# Altium PCB PCB.PcbDoc
Units mm, origin at the board's own origin, x right, y up, seen from the top; angles counter-clockwise.
Board outline 79.7 x 42.8 mm, 2 copper layers (Top Layer, Bottom Layer), stack 1.571 mm thick; 109 components, 84 nets, 378 pads, 105 vias.
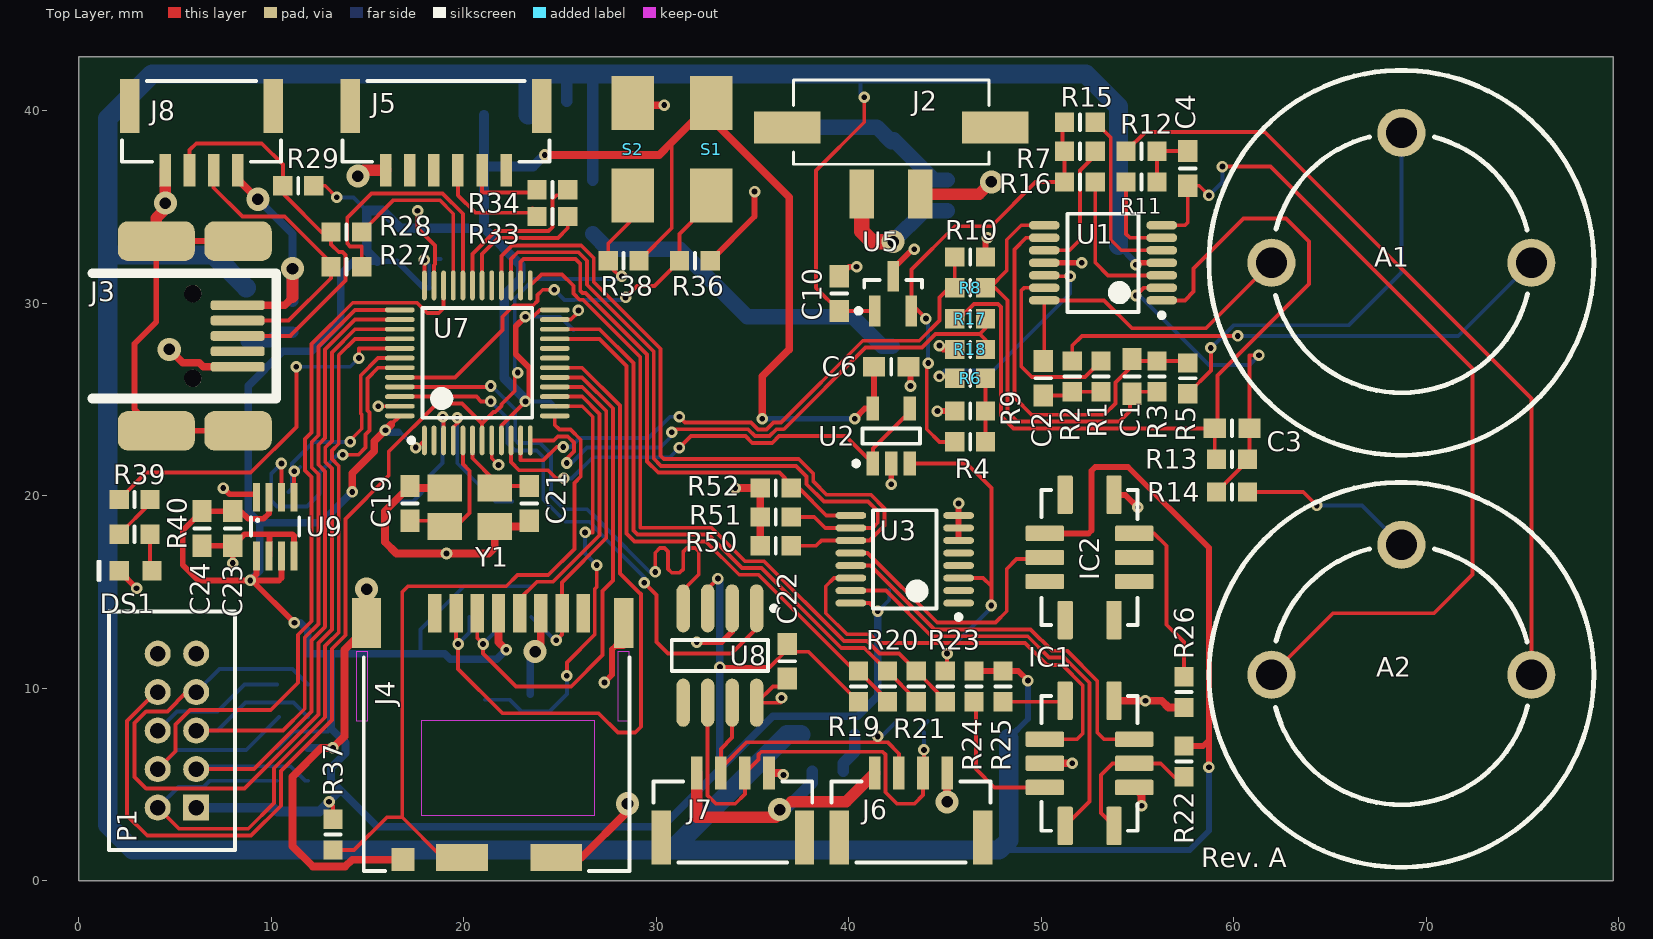
[diagram p0: Top Layer view]
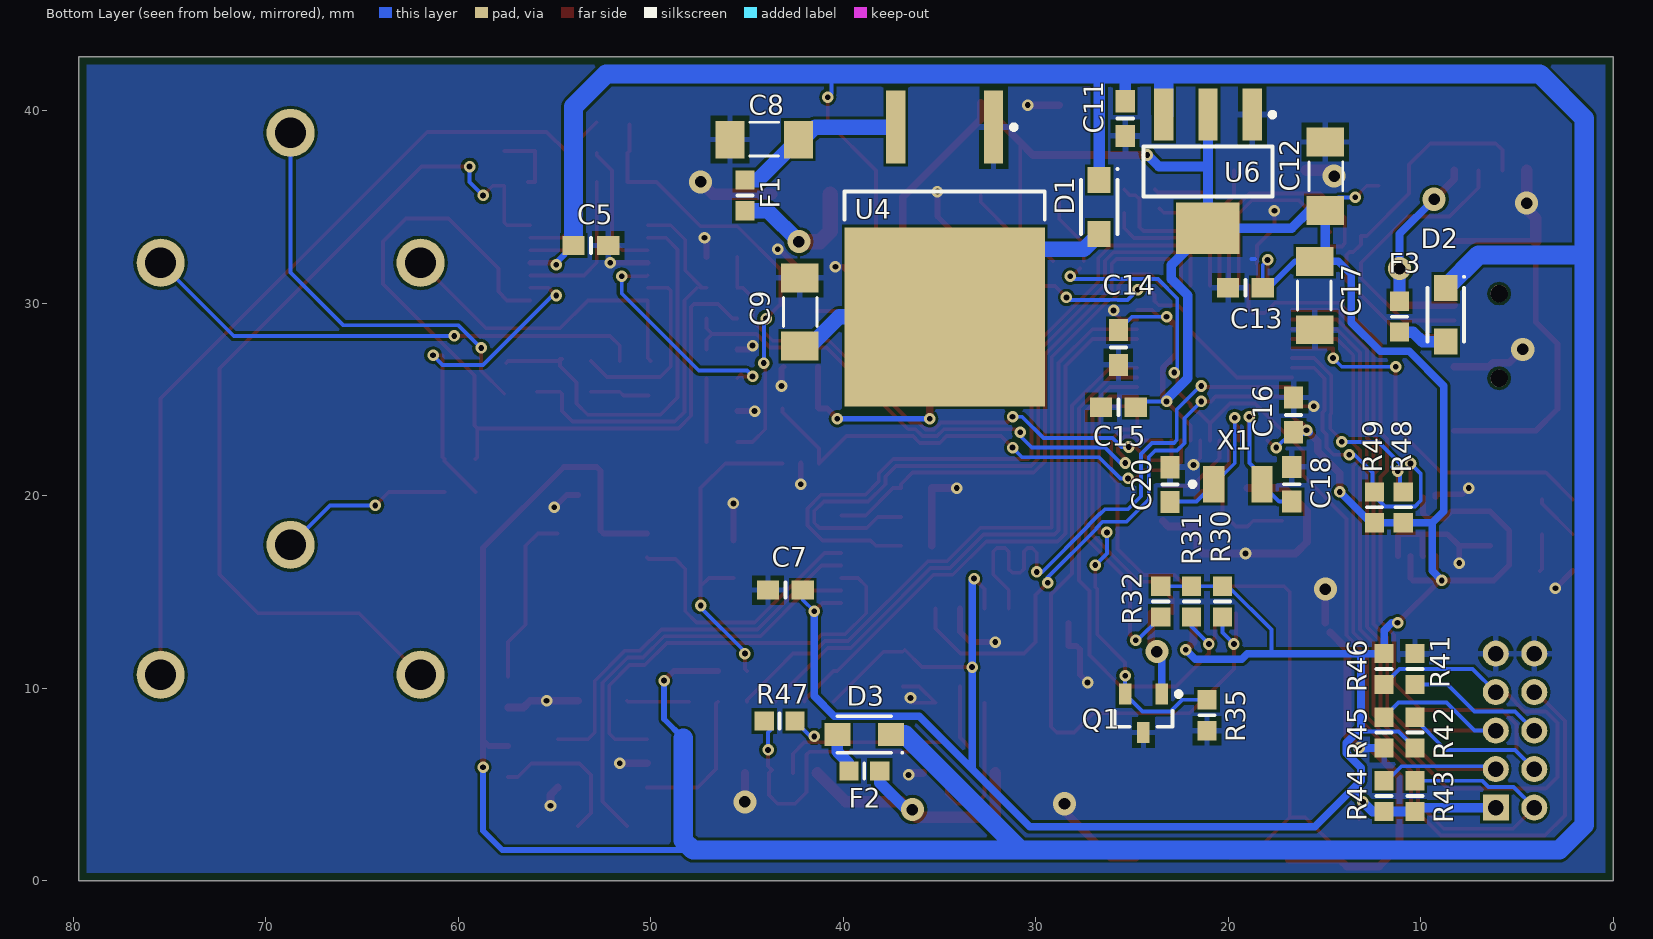
[diagram p1: Bottom Layer view, seen from below]
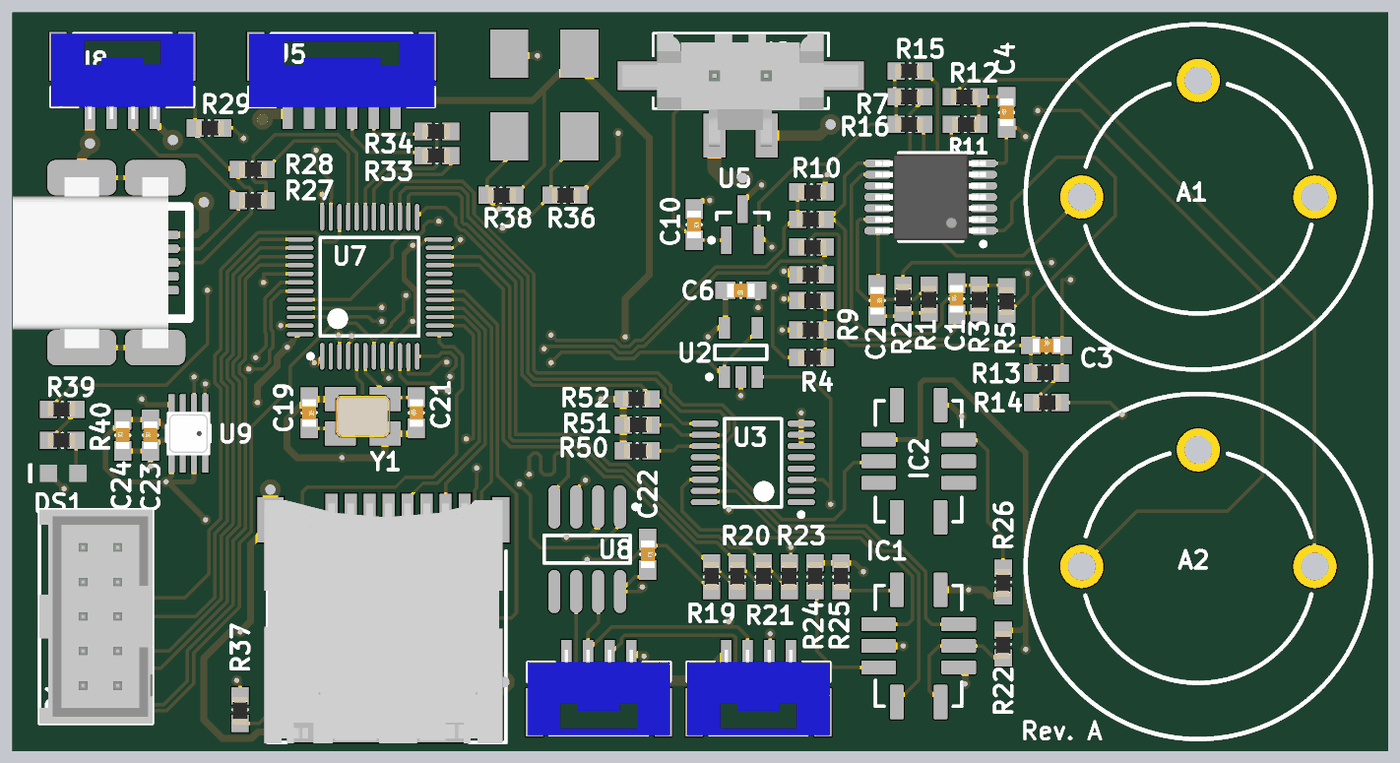
[diagram p2: 3D render of the assembled board from above, using the file's embedded part models]
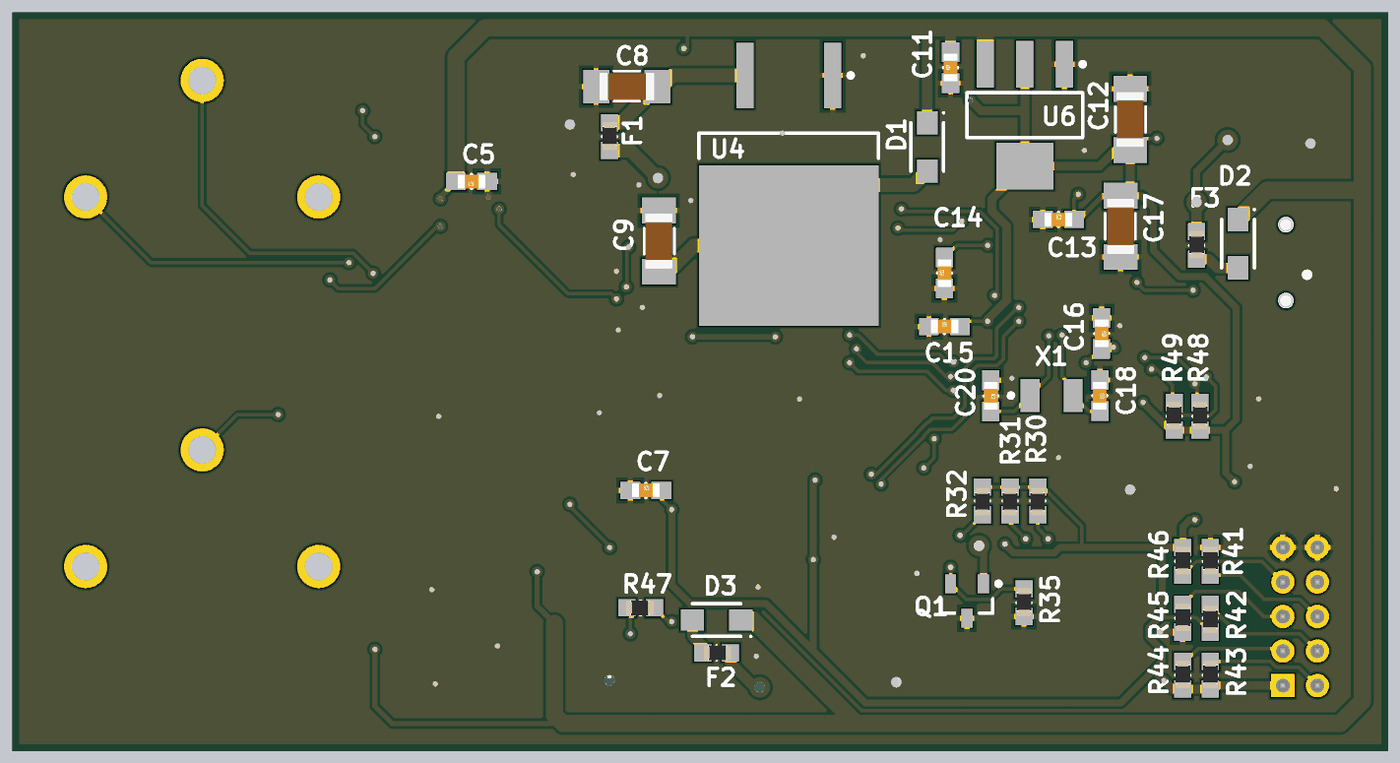
[diagram p3: 3D render of the assembled board from below, using the file's embedded part models]

## Layer stack, top to bottom
Top Solder: solder mask 0.0102, Solder Resist, Dk 3.5
Top Layer: signal copper 0.0356
Dielectric 1: dielectric 1.5, FR-4, Dk 4.8
Bottom Layer: signal copper 0.0356
Bottom Solder: solder mask 0.0102, Solder Resist, Dk 3.5

## Board outline
0,0 0,42.8 79.7,42.8 79.7,0

## Design rules (kind name [scope] priority, off if disabled: settings)
BoardOutlineClearance [All] p1: gap=0.4
Clearance [All] p1: gap=0.152
DiffPairsRouting [All] p1: maxlimit=0.254 minlimit=0.152 mostfreqgap=0.2 toplayer_minwidth=0.152 toplayer_maxwidth=0.381 toplayer_prefwidth=0.2 bottomlayer_minwidth=0.152 bottomlayer_maxwidth=0.381 bottomlayer_prefwidth=0.2 maxuncoupledlength=12.7
HoleSize [All] p1: absolutevalues=TRUE maxlimit=6.35 minlimit=0.3 maxpercent=80.000 minpercent=20.000
HoleToHoleClearance [All] p1: gap=0.2 allowstackedmicrovias=FALSE
MinimumSolderMaskSliver [All] p1: minsoldermaskwidth=0.1
PolygonConnect PolygonConnect_1 [IsVia] p1: connectstyle=Direct reliefconductorwidth=0.25 reliefentries=4 polygonreliefangle="90 Angle" airgapwidth=0.25
PolygonConnect [All] p2: connectstyle=Relief reliefconductorwidth=0.3 reliefentries=4 polygonreliefangle="90 Angle" airgapwidth=0.25
RoutingVias [All] p1: holewidth=0.3 width=0.5 viastyle="Through Hole" minholewidth=0.3 minwidth=0.5 maxholewidth=6.35 maxwidth=6 useviatemplates=TRUE viatemplateguid#1={BE180F16-D59F-4BDA-BE2E-8A3C3E13AB17} viatemplateguid#2={6D63B698-CA47-4CFF-A710-8FF1CC614475} viatemplatename#1=v60h30m0mx0 viatemplatename#2=v120h60m0mx0
SilkToSilkClearance [All] p1: silktosilkclearance=0
SilkToSolderMaskClearance [IsPad] p1: minsilkscreentomaskgap=0.178 clearancetoexposedcopper=TRUE
SolderMaskExpansion SolderMaskExpansion_1 [InComponent('U7')] p1: expansion=0.05
SolderMaskExpansion [All] p2: expansion=0.08
Width [All] p1: maxlimit=6 minlimit=0.152 preferedwidth=0.2
24 further rules are at their usual default settings.

## Classes and differential pairs
component class Processing: C13 C14 C15 C16 C17 C18 C19 C20 C21 C22 DS1 F2 F3 J3 J4 J5 J6 J7 J8 P1 Q1 R27 R28 R29 R30 R31 R32 R33 R34 R35 R36 R37 R38 R39 R40 R41 R42 R43 R44 R45 R46 R47 R48 R49 S1 S2 U7 U8 X1 Y1
component class Power: C8 C9 C10 C11 C12 D1 D2 D3 F1 J2 U4 U5 U6
component class MiCS_Sensors: C6 C7 IC1 IC2 R19 R20 R21 R22 R23 R24 R25 R26 R50 R51 R52 U2 U3
component class Electrochemical_sensors: A1 A2 C1 C2 C3 C4 C5 R1 R2 R3 R4 R5 R6 R7 R8 R9 R10 R11 R12 R13 R14 R15 R16 R17 R18 U1
component class Sensors: C23 C24 U9
net class SEN_SEL[1..3]: SEN_SEL1 SEN_SEL2 SEN_SEL3
differential pair CANBUS: +CAN_RX -CAN_TX
differential pair CAN: +CAN_P -CAN_N

## Components (designator, comment, footprint, x,y, rotation, side; value= is the part's Value field where it differs from the comment)
A1 "Electrochemical sensors" ELECTROCHEMICAL 68.7,32.1 r0 top
A2 "Electrochemical sensors" ELECTROCHEMICAL 68.7,10.7 r0 top
C1 "Capacitor" 0603_CAP 54.7,26.2 r90 top
C2 "Capacitor" 0603_CAP 50.1,26.1 r270 top
C3 "Capacitor" 0603_CAP 59.9,23.5 r0 top
C4 "Capacitor" 0603_CAP 57.6,37 r90 top
C5 "Capacitor" 0603_CAP 53.1,33 r0 bottom
C6 "Capacitor" 0603_CAP 42.2,26.7 r180 top
C7 "Capacitor" 0603_CAP 43,15.1 r180 bottom
C8 "Capacitor" 1206_CAP 44.1,38.5 r180 bottom
C9 "Capacitor" 1206_CAP 42.25,29.545 r270 bottom
C10 "Capacitor" 0603_CAP 39.5,30.5 r270 top
C11 "Capacitor" 0603_CAP 25.35,39.594 r90 bottom
C12 "Capacitor" 1206_CAP 14.95,36.594 r270 bottom
C13 "Capacitor" 0603_CAP 19.1,30.8 r180 bottom
C14 "Capacitor" 0603_CAP 25.7,27.7 r90 bottom
C15 "Capacitor" 0603_CAP 25.7,24.6 r180 bottom
C16 "Capacitor" 0603_CAP 16.6,24.2 r270 bottom
C17 "Capacitor" 1206_CAP 15.5,30.4 r90 bottom
C18 "Capacitor" 0603_CAP 16.7,20.6 r270 bottom
C19 "Capacitor" 0603_CAP 17.2,19.6 r270 top
C20 "Capacitor" 0603_CAP 23.015,20.583 r270 bottom
C21 "Capacitor" 0603_CAP 23.4,19.6 r90 top
C22 "Capacitor" 0603_CAP 36.8,11.4 r270 top
C23 "Capacitor" 0603_CAP 8,18.3 r90 top
C24 "Capacitor" 0603_CAP 6.4,18.3 r90 top
D1 "PMEG3010ER" SOD123W 26.7,35 r270 bottom
D2 "PMEG3010ER" SOD123W 8.7,29.4 r270 bottom
D3 "PMEG3010ER" SOD123W 38.9,7.6 r0 bottom
DS1 "APG1608SEKC/T" KING-LED0603-25-ORANGE_V 2.95,16.1 r0 top
F1 "2A" 0603_RES 45.1,35.6 r270 bottom
F2 "Fuse" 0603_RES 38.9,5.7 r0 bottom
F3 "Fuse" 0603_RES 11.1,29.3 r270 bottom
IC1 "MiCS-6814" MiCS 52.5,6.1 r270 top
IC2 "MiCS-2614" MiCS 52.5,16.795 r90 top
J2 "43650-0224" 43650-0224 42.2,39.124 r180 top
J3 "67503-1020" MOLX-67503-1020_V 8.25,29.9 r0 top
J4 "Mirco SD socket" HRS_DM3CS-SF 18.5,14.9 r180 top
J5 "BM06B-GHS-TBT" BM06B-GHS-TBT 22.195,36.9 r180 top
J6 "BM04B-GHS-TBT" BM04B-GHS-TBT 41.35,5.6 r0 top
J7 "BM04B-GHS-TBT" BM04B-GHS-TBT 32.1,5.6 r0 top
J8 "BM04B-GHS-TBT" BM04B-GHS-TBT 8.25,36.9 r180 top
P1 "LTMM-105-02-TX-D" SMTC-LTMM-105-02-XX-D 6.1,3.8 r90 top
Q1 "N-channel MOSFET" SOT95P230X110-3M 24.4,8.7 r270 bottom
R1 "Resitor" 0603_RES 53.1,26.2 r90 top
R2 "Resitor" 0603_RES 51.6,26.2 r270 top
R3 "Resitor" 0603_RES 56,26.2 r90 top
R4 "Resitor" 0603_RES 46.3,22.8 r180 top
R5 "Resitor" 0603_RES 57.6,26.1 r90 top
R6 "Resitor" 0603_RES 46.3,26.1 r180 top
R7 "Resitor" 0603_RES 52,37.9 r0 top
R8 "Resitor" 0603_RES 46.3,30.8 r0 top
R9 "Resitor" 0603_RES 46.3,24.4 r0 top
R10 "Resitor" 0603_RES 46.3,32.4 r180 top
R11 "Resitor" 0603_RES 55.2,36.3 r180 top
R12 "Resitor" 0603_RES 55.2,37.9 r0 top
R13 "Resitor" 0603_RES 59.9,21.9 r0 top
R14 "Resitor" 0603_RES 59.9,20.2 r180 top
R15 "Resitor" 0603_RES 52,39.4 r0 top
R16 "Resitor" 0603_RES 52,36.3 r0 top
R17 "Resitor" 0603_RES 46.3,29.2 r180 top
R18 "Resitor" 0603_RES 46.3,27.6 r0 top
R19 "Resitor" 0603_RES 40.5,10.1 r270 top
R20 "Resitor" 0603_RES 42,10.1 r270 top
R21 "Resitor" 0603_RES 43.5,10.1 r270 top
R22 "Resitor" 0603_RES 57.4,6.2 r90 top
R23 "Resitor" 0603_RES 45,10.1 r270 top
R24 "Resitor" 0603_RES 46.5,10.1 r270 top
R25 "Resitor" 0603_RES 48,10.1 r270 top
R26 "Resitor" 0603_RES 57.4,9.8 r90 top
R27 "Resitor" 0603_RES 13.9,31.9 r180 top
R28 "Resitor" 0603_RES 13.9,33.7 r180 top
R29 "Resitor" 0603_RES 11.4,36.1 r180 top
R30 "Resitor" 0603_RES 20.3,14.5 r90 bottom
R31 "Resitor" 0603_RES 21.9,14.5 r90 bottom
R32 "Resitor" 0603_RES 23.5,14.5 r90 bottom
R33 "Resitor" 0603_RES 24.6,34.5 r0 top
R34 "Resitor" 0603_RES 24.6,35.9 r0 top
R35 "Resitor" 0603_RES 21.1,8.6 r270 bottom
R36 "Resitor" 0603_RES 32,32.2 r180 top
R37 "Resitor" 0603_RES 13.2,2.4 r90 top
R38 "Resitor" 0603_RES 28.3,32.2 r180 top
R39 "Resitor" 0603_RES 2.9,19.8 r0 top
R40 "Resitor" 0603_RES 2.9,18 r0 top
R41 "Resitor" 0603_RES 10.3,11 r270 bottom
R42 "Resitor" 0603_RES 10.3,7.7 r90 bottom
R43 "Resitor" 0603_RES 10.3,4.4 r270 bottom
R44 "Resitor" 0603_RES 11.9,4.4 r270 bottom
R45 "Resitor" 0603_RES 11.9,7.7 r270 bottom
R46 "Resitor" 0603_RES 11.9,11 r270 bottom
R47 "Resitor" 0603_RES 43.3,8.3 r180 bottom
R48 "Resitor" 0603_RES 10.9,19.4 r270 bottom
R49 "Resitor" 0603_RES 12.4,19.4 r270 bottom
R50 "Resitor" 0603_RES 36.2,17.4 r180 top
R51 "Resitor" 0603_RES 36.2,18.9 r180 top
R52 "Resitor" 0603_RES 36.2,20.4 r0 top
S1 "147873-1" 147873-1 32.85,38.005 r90 top
S2 "147873-1" 147873-1 28.775,38.005 r90 top
U1 "TSZ124" TSOP65P640X120-14M 53.2,32.1 r180 top
U2 "TSZ121" SOT95P280X145-5M 42.2,23.1 r90 top
U3 "SN74LV4051A" TSOP65P640X120-16M 42.9,16.7 r180 top
U4 "LD1086D2T50TR" TO-263_N 34.725,32.845 r270 bottom
U5 "REF3025AIDBZR" TI-DBZ3_N 42.3,30.5 r90 top
U6 "LD1117AS33TR" SOT-223_M 21.05,36.844 r270 bottom
U7 "STM32F103CBT6" STM-LQFP48_L 20.7,26.9 r90 top
U8 "MAX3051" SOIC127P600X175-8M 33.3,11.7 r270 top
U9 "BME280" BME280 10.2,18.4 r90 top
X1 "ABS07-32.768KHz-T" ABRA-ABS07-2_V 19.5,20.6 r180 bottom
Y1 "TSX-3225 16.0000MF09Z-AC3" TSX-3225 20.3,19.4 r0 top

## Footprints (in the part's own frame and the unit in brackets; to place one, negate y for a bottom-side part, rotate by r counter-clockwise, add the part's x,y. Pads: shape width x height; smd on the part's side, far side on the other; paste and mask are expansions set on the pad)
0603_CAP [mm] "Chip Capacitor, 2-Leads, Body 1,60x0,80mm, IPC Low Density"
  rect 1.15x1 smd: 1(-0.9,0) 2(0.9,0)
  silkscreen extent 0,-0.4 0,0.4, body extent -0.8,-0.4 0.8,0.4, height 0.3
0603_RES [mm] "Chip Resistor, 2-Leads, Body 1,57x0,85mm, IPC Medium Density"
  rect 1x1 smd: 1(-0.8,0) 2(0.8,0)
  silkscreen extent 0,-0.4 0,0.4, body extent -0.85,-0.42 0.75,0.43, height 0.45
1206_CAP [mm] "Chip Capacitor, 2-Leads, Body 3,20x1,60mm, IPC Low Density"
  rect 1.5x1.95 smd: 1(-1.775,0) 2(1.775,0)
  silkscreen extent -0.75,-0.85 0.75,0.9, body extent -1.6,-0.8 1.6,0.8, height 1.6
43650-0224 [mil]
  rect 50x100 smd: 1(60,136) 2(-59.06,136)
  rect 136x65 smd: TAB1(213,0) TAB2(-212.2,0)
  silkscreen extent -200,-97 200,75, body extent -268,-97 270,161, height 392
147873-1 [mm] "SPST TE Conectivity push button"
  rect 2.8x2.2 smd: 1(-2.4,0) 2(2.4,0)
  body extent -3,-1.75 3,1.75, height 5
ABRA-ABS07-2_V [mm] "Hand Drawn, 2-Leads, Body 3.2x1.5mm, Pitch 2.5mm"
  rect 1.1x1.9 smd: 1(-1.25,0) 2(1.25,0)
  silkscreen extent -2.48,-0.12 -2.23,0.12, body extent -1.6,-0.75 1.6,0.75, height 0.9
BM04B-GHS-TBT [mm] "Vertical"
  rect 1x2.8 smd: 0(-1.85,-3.35) 0(5.6,-3.35)
  rect 0.6x1.7 smd: 1(0,0) 2(1.25,0) 3(2.5,0) 4(3.75,0)
  silkscreen extent -2.25,-4.65 6,-0.45, body extent -2.25,-4.68 6,0.27, height 4.18
BM06B-GHS-TBT [mm] "Vertical"
  rect 1x2.8 smd: 0(-1.85,-3.35) 0(8.1,-3.35)
  rect 0.6x1.7 smd: 1(0,0) 2(1.25,0) 3(2.5,0) 4(3.75,0) 5(5,0) 6(6.25,0)
  silkscreen extent -2.25,-4.65 8.5,-0.45, body extent -2.28,-4.65 8.48,0.3, height 3.88
BME280 [mm]
  rect 1.5x0.35 smd mask+0.08: 1(1.525,0.975) 2(1.525,0.325) 3(1.525,-0.325) 4(1.525,-0.975) 5(-1.525,-0.975) 6(-1.525,-0.325) 7(-1.525,0.325) 8(-1.525,0.975)
  silkscreen extent -0.48,-1.25 0.48,1.25, body extent -1.25,-1.25 1.25,1.25, height 0.95
ELECTROCHEMICAL [mm]
  round 2.5 hole 1.6: C(-6.75,0) R(6.75,0) S(0,6.75)
  silkscreen extent -10,-10 10,10, body extent -10,-10 10,10, height 16.6
HRS_DM3CS-SF [mm]
  rect 1x2.6 smd: 0(-9.8,1.5)
  rect 2.7x1.4 smd: 0(-6.3,13.7) A(-1.4,13.7)
  rect 1.2x1.2 smd: 0(1.65,13.8)
  rect 1.5x2.6 smd paste-25.4 mask-25.4: 0(3.55,1.5)
  rect 0.7x2 smd paste-25.4 mask-25.4: 1(0,1) 2(-1.1,1) 3(-2.2,1) 4(-3.3,1) 5(-4.4,1) 6(-5.5,1) 7(-6.6,1) 8(-7.7,1)
  Top Layer keep-out region: -8.3,6.6 0.7,6.6 0.7,11.5 -8.3,11.5
  Top Layer keep-out region: -10.1,3 -9.5,3 -9.5,6.6 -10.1,6.6
  Top Layer keep-out region: 3.5,3 4.1,3 4.1,6.6 3.5,6.6
  silkscreen extent -10.1,3.3 3.7,14.4, body extent -9.9,0.35 3.9,14.45, height 1.98
KING-LED0603-25-ORANGE_V [mm] "LED, SMT, Body 1.6 x 0.8 mm, 0.25mm Thickness"
  rect 1x1 smd paste+0 mask+0: 1(0.85,0) 2(-0.85,0)
  body extent -0.8,-0.4 0.8,0.4, height 0.25
MiCS [mm]
  rrect20% 0.8x2 smd: A(-1.25,-2.32) B(0,-2.32) C(1.25,-2.32) F(1.25,2.32) G(0,2.32) H(-1.25,2.32)
  rrect20% 2x0.8 smd: D(3.25,-1.27) E(3.25,1.27) J(-3.25,1.27) K(-3.25,-1.27)
  silkscreen extent -3.5,-2.5 3.5,2.5
MOLX-67503-1020_V [mm] "Mini USB Connector, SMT, Righer Angle"
  rrect50% 2.8x0.5 smd: 1(0,0) 2(0,-0.8) 3(0,-1.6) 4(0,-2.4) 5(0,-3.2)
  rrect50% 3.5x2.05 smd: 6(0.025,3.325) 8(0.025,-6.525)
  rrect50% 4x2.05 smd: 7(-4.225,3.325) 9(-4.225,-6.525)
  round 0.9 hole 0.9 unplated: X(-2.325,-3.8) Y(-2.325,0.6)
  silkscreen extent -7.55,-4.85 2,1.65, body extent -8.22,-6.56 0.78,3.34, height 3.95
SMTC-LTMM-105-02-XX-D [mm] "Shrouded Header & Stacker, 2x5 Pins, Vertical, 2mm Pitch, Male"
  rect 1.35x1.35 hole 0.81: 1(0,0)
  round 1.35 hole 0.81: 2(0,2) 3(2,0) 4(2,2) 5(4,0) 6(4,2) 7(6,0) 8(6,2) 9(8,0) 10(8,2)
  silkscreen extent -2.19,-2.01 10.19,4.53, body extent -2.19,-2.01 10.19,4.52, height 4.83
SOD123W [mm] "Molded Diode, 2-Leads, Body 2,60x1,70mm, IPC Low Density"
  rect 1.35x1.2 smd: 1(-1.4,0) 2(1.4,0)
  silkscreen extent -2.02,-0.95 1.4,1, body extent -1.4,-0.95 1.4,0.95, height 1.1
SOIC127P600X175-8M [mm] "SOIC, 8-Leads, Body 4,90x3,90mm, Pitch 1,27mm, IPC Low Density"
  oval 2.5x0.7 smd: 1(-2.45,1.905) 2(-2.45,0.635) 3(-2.45,-0.635) 4(-2.45,-1.905) 5(2.45,-1.905) 6(2.45,-0.635) 7(2.45,0.635) 8(2.45,1.905)
  silkscreen extent -2.57,-2.5 0.8,2.93, body extent -2,-2.5 2,2.5, height 1.75
SOT95P230X110-3M [mm] "SOT23, 3-Leads, Body 2,90x2,30mm, Pitch 0,95mm, IPC Low Density"
  rect 1.1x0.65 smd: 1(-1,0.95) 2(-1,-0.95) 3(1,0)
  silkscreen extent -1.12,-1.5 0.7,1.95, body extent -0.7,-1.5 0.7,1.5, height 1.1
SOT95P280X145-5M [mm] "SOT23, 5-Leads, Body 2,90x2,80mm, Pitch 0,95mm, IPC Low Density"
  rect 1.25x0.65 smd: 1(-1.425,0.95) 2(-1.425,0) 3(-1.425,-0.95) 4(1.425,-0.95) 5(1.425,0.95)
  silkscreen extent -1.55,-1.5 0.4,1.95, body extent -0.8,-1.5 0.8,1.5, height 1.45
SOT-223_M [mm] "SOT223, 4-Leads, Body 6.5x3.5mm, Pitch 2.3mm, Lead Span 7mm, IPC Low Density"
  rect 2.7x1 smd: 1(-2.95,2.3) 2(-2.95,0) 3(-2.95,-2.3)
  rect 2.7x3.3 smd: 4(2.95,0)
  silkscreen extent -3.07,-3.35 1.3,3.47, body extent -1.85,-3.35 1.85,3.35, height 1.8
STM-LQFP48_L [mm] "QFP, 48-Leads, Body 7x7mm, Pitch 0.5mm, IPC High Density"
  oval 1.55x0.25 smd: 1(-4.025,2.75) 2(-4.025,2.25) 3(-4.025,1.75) 4(-4.025,1.25) 5(-4.025,0.75) 6(-4.025,0.25) 7(-4.025,-0.25) 8(-4.025,-0.75) 9(-4.025,-1.25) 10(-4.025,-1.75) 11(-4.025,-2.25) 12(-4.025,-2.75) 25(4.025,-2.75) 26(4.025,-2.25) 27(4.025,-1.75) 28(4.025,-1.25) 29(4.025,-0.75) 30(4.025,-0.25) 31(4.025,0.25) 32(4.025,0.75) 33(4.025,1.25) 34(4.025,1.75) 35(4.025,2.25) 36(4.025,2.75)
  oval 0.25x1.55 smd: 13(-2.75,-4.025) 14(-2.25,-4.025) 15(-1.75,-4.025) 16(-1.25,-4.025) 17(-0.75,-4.025) 18(-0.25,-4.025) 19(0.25,-4.025) 20(0.75,-4.025) 21(1.25,-4.025) 22(1.75,-4.025) 23(2.25,-4.025) 24(2.75,-4.025) 37(2.75,4.025) 38(2.25,4.025) 39(1.75,4.025) 40(1.25,4.025) 41(0.75,4.025) 42(0.25,4.025) 43(-0.25,4.025) 44(-0.75,4.025) 45(-1.25,4.025) 46(-1.75,4.025) 47(-2.25,4.025) 48(-2.75,4.025)
  silkscreen extent -4.15,-2.85 2.85,3.55, body extent -3.5,-3.5 3.5,3.5, height 1.6
TI-DBZ3_N [mm] "SOT23, 3-Leads, Body 2.92x1.3 mm, Pitch 0.95 mm, IPC Medium Density"
  rect 1.6x0.6 smd: 1(-0.9,0.95) 2(-0.9,-0.95) 3(0.9,0)
  silkscreen extent -1.02,-1.5 0.7,1.92, body extent -0.7,-1.52 0.7,1.52, height 1.12
TO-263_N [mm] "D2-PAK, 4-Leads, Body 9.2x10.2mm, Pitch 2.54mm, Lead Span 15.4mm, IPC Medium Density"
  rect 3.8x1 smd: 1(-6.3,2.54) 3(-6.3,-2.54)
  rect 9.3x10.4 smd: 4(3.55,0)
  silkscreen extent -6.42,-5.2 -1.5,5.2, body extent -2.95,-5.2 6.4,5.2, height 4.6
TSOP65P640X120-14M [mm] "TSOP, 14-Leads, Body 5,00x4,40mm, Pitch 0,65mm, IPC Low Density"
  oval 1.6x0.45 smd mask+0.05: 1(-3.05,1.95) 2(-3.05,1.3) 3(-3.05,0.65) 4(-3.05,0) 5(-3.05,-0.65) 6(-3.05,-1.3) 7(-3.05,-1.95) 8(3.05,-1.95) 9(3.05,-1.3) 10(3.05,-0.65) 11(3.05,0) 12(3.05,0.65) 13(3.05,1.3) 14(3.05,1.95)
  silkscreen extent -3.18,-2.55 1.85,2.85, body extent -3.2,-2.5 3.2,2.5, height 1.1
TSOP65P640X120-16M [mm] "TSOP, 16-Leads, Body 5,00x4,40mm, Pitch 0,65mm, IPC Low Density"
  oval 1.6x0.35 smd: 1(-2.8,2.275) 2(-2.8,1.625) 3(-2.8,0.975) 4(-2.8,0.325) 5(-2.8,-0.325) 6(-2.8,-0.975) 7(-2.8,-1.625) 8(-2.8,-2.275) 9(2.8,-2.275) 10(2.8,-1.625) 11(2.8,-0.975) 12(2.8,-0.325) 13(2.8,0.325) 14(2.8,0.975) 15(2.8,1.625) 16(2.8,2.275)
  silkscreen extent -2.93,-2.55 1.65,3.12, body extent -2.25,-2.55 2.25,2.55, height 1.2
TSX-3225 [mm]
  rect 1.8x1.4 smd: 1(-1.3,-1) 2(1.3,-1) 3(1.3,1) 4(-1.3,1)
  body extent -1.6,-1.25 1.6,1.25, height 0.6

## Part data
A1 A2: library part Electrochemical_sensor
D1 D2 D3: library part "D Schottky", "Schottky Diode"
DS1: library part CMP-0239-00002-1, "LED, SMT, 0603(1608), 0.25mm Tthickness, Super Bright Orange"
F1: library part Fuse
IC2: library part MiCS-5524
J2: library part HEADER_POS2_?43650-0224, "Molex - Micro-Fit 3.0 Series connector,  3.00mm (0.118\") pitch header, 2 positions."
J3: library part CMP-0411-00002-1, "USB, MINI, SMD, RA KME04-USBMU03A01"
J4: library part Micro_SD
J5 J6 J7 J8: "JST GH top entry SMD connector"
P1: library part CMP-1028-00010-1, "Shrouded Header & Stacker, Through-Hole, Vertical, -55 to 105 degC, 2 mm Pitch, 10-Pin, Male, RoHS"
Q1: library part MOSFET-N
S1 S2: library part SW-SPST, "Single-Pole, Single-Throw Switch"
U3: "Analog Multiplexer/Demultiplexer"
U4: library part CMP-0244-00124-1, "1.5A, Low Drop Positive Voltage Regulator, 5.0V, 3-Pin D2PAK, Tape and Reel"
U5: library part CMP-0367-00155-1, "2.5 V, 50 ppm / degC, 50 uA Series (Bandgap) Voltage Reference, -40 to 125 degC, 3-pin SOT-23 (DBZ), Green (RoHS & no Sb/Br)"
U6: library part CMP-0244-00316-1, "1A, Low Drop Positive Voltage Regulator, 3.3V, 4-Pin SOT-223, Tape and Reel"
U7: library part CMP-0237-00250-3, "ARM Cortex-M3 32-bit MCU, 128 KB Flash, 20 KB Internal RAM, 37 I/Os, 48-pin LQFP, -40 to 85 degC, Tray"
U9: "Combined humidity and pressure sensor"
X1: library part CMP-0447-00001-2, "Crystal, 32.768 kHz, 12.5 pF, -40 to 85 degC, SMD Low Profile 3.2 x 1.5 x 0.9 mm, Tape and Reel"

## Via types
v1: diameter 0.6, hole 0.3, Top Layer to Bottom Layer, tented both sides, 93 vias
v2: diameter 1.2, hole 0.6, Top Layer to Bottom Layer, tented both sides, 12 vias

## Nets (pads, with @x,y where several pads share a name; then routed paths per layer and width w, separated by ;. In a path a pad name is that pad's centre, name@x,y a point inside that pad or via, vN(x,y) a via of type N, cw(c..) or ccw(c..) an arc to the next point about the centre after c; other vN are vias at no path point)
2.5V: R4.2 R7.1 R15.1 R16.1 U5.2 | length 23.3
  Top Layer w0.2: v1(44,29.2) 43.3,29.9 43.25,29.9 43.25,31.75 45.5,34 47.4,34 49.7,36.3 R16.1 51.2,37.8 51.1,37.9 R15.1@51.1,39.3 ; v1(44.127,26.891) 44.048,26.812 44.048,23.452 44.7,22.8 R4.2
  Bottom Layer w0.2: v1(44,29.2) 44.109,29.091 44.109,26.891 v1(44.127,26.891)
3.3V: C6.2 C7.2 C12.2 C13.2 C14.2 C15.2 C16.2 C17.2 C22.1 C23.2 C24.2 J4.4 P1.1 R19.2 R29.1 R30.2 R31.2 R32.2 R37.2 R38.1 R42.1 R43.2 R44.2 R46.1 R48.2 R49.2 S1.2 U2.5 U3.16 U6.2 U6.4 U7.1 U7.9 U7.24 U7.36 U7.48 U8.3 U9.2 U9.6 U9.8 | length 251.5
  Top Layer w0.2: R29.1 12.8,36.1 v1(13.4,35.5) ; v1(13,4.1) 13.2,3.9 R37.2 ; 16.225,23.7 U7.48 ; v1(17.5,22.5) 17.575,22.5 U7.1 ; U7.36 v1(17.95,32.25) ; U7.9 21.95,23.65 v1(23.2,24.9) ; v1(23.2,29.3) 23.6,29.3 23.95,29.65 U7.24 ; R38.1 30.8,33.9 30.8,38.355 ; U8.3 32.665,15.165 v1(33.2,15.7) ; v1(33.3,11.1) 35.9,11.1 36.8,12 36.9,11.9 37.9,11.9 R19.2 ; U3.16 41.075,14.425 v1(41.5,14)
  Top Layer w0.3: U9.8 9.225,15.925 v1(8.9,15.6) ; U9.2 9.875,19.075 9.6,18.8 8.8,18.8 8.4,19.2 C23.2 C24.2 5.4,18.2 5.4,16.4 6.2,15.6 v1(8.9,15.6) ; U9.6 10.525,15.725 10.4,15.6 v1@9,15.6 ; v1(11.2,13.4) v1@9,15.6 ; v1(23.2,24.9) 23.4,25.1 23.4,26.148 23.402,26.15 23.402,26.65 22.7,27.352 22.7,28.8 v1(23.2,29.3) ; v1(40.3,24) 40.825,24.525 U2.5 41.3,24.575 C6.2 ; v1(8.9,15.6) v1@9,15.6
  Top Layer w0.4: v1(14.2,20.2) 14.2,21.16 15.35,22.31 15.35,22.825 v1(15.925,23.4) 16.225,23.7 ; J4.4 21.8,12.4 v1(22.2,12) ; v1(24.2,37.7) 30.145,37.7 30.8,38.355 S1.2 32.85,39.55 36.9,35.5 36.9,27.6 35.5,26.2 v1(35.5,24)
  Bottom Layer w0.2: R42.1 11.148,7.748 12.948,7.748 13.1,7.9 ; v1(13.4,35.5) 14.269,35.5 C12.2 ; C16.2 16.7,23.3 v1(17.5,22.5) ; 17.7,11.8 17.75,11.85 17.75,13.05 20,15.3 R30.2 R31.2 R32.2 ; v1(17.95,32.25) 18.2,32 C13.2 ; v1(23.2,24.9) 24.5,24.9 C15.2 ; v1(23.2,29.3) 25,29.3 C14.2 ; v1(41.5,14) 42.1,14.6 C7.2
  Bottom Layer w0.3: v1(11.2,13.4) v1@11.5,13.4 ; C17.2 16.525,32.175 17.9,30.8 C13.2 ; v1(35.5,24) v1(40.3,24)
  Bottom Layer w0.4: v1(8.9,15.6) 9.4,16.1 9.4,18.6 ; v1@11.5,13.4 11.9,13 R46.1 13.2,11.8 ; v1(13,4.1) 13.5,4.6 13.7,4.6 ; v1(14.2,20.2) 12.6,18.6 R49.2 R48.2 9.4,18.6 ; C17.2 14.275,32.175 13.6,31.5 13.6,29 12.1,27.5 10.6,27.5 8.8,25.7 8.8,19.2 9.4,18.6 ; v1@15.8,23.3 C16.2 ; v1(22.2,12) 21.7,11.5 19.3,11.5 19,11.8 17.7,11.8 13.2,11.8 ; v1(33.2,15.7) 33.3,15.6 v1(33.3,11.1) 33.3,5.8 ; v1(41.5,14) 41.5,9.6 40.452,8.552 36.052,8.552 33.3,5.8 ; 13.2,11.8 13.1,11.7 13.1,7.9 13.123,7.9 13.852,7.17 13.852,6.63 13.1,5.877 13.1,5.2 13.7,4.6 ; 13.7,4.6 15.5,2.8 30.3,2.8 33.3,5.8
  Bottom Layer w0.5: P1.1 10.1,3.8 R43.2 R44.2 12.5,3.6 v1(13,4.1) ; C17.2 14.95,32.725 C12.2 15.781,34.819 16.706,33.894 U6.4 ; U6.2 21.05,37.1 ; v1(23.2,24.9) 23.2,25.007 22.098,26.109 22.098,30.408 22.95,31.26 22.95,31.994 U6.4 ; v1(24.2,37.7) 23.6,37.1 21.05,37.1 ; U6.4 21.05,37.1
5V: C5.2 C10.2 C11.2 D1.1 D2.1 D3.1 IC2.F R22.2 R24.1 R25.1 U1.4 U5.1 U6.3 | length 243.1
  Top Layer w0.2: v1(40.8,40.7) 40.8,39.4 38.3,36.9 38.3,30.8 C10.2 U5.1
  Top Layer w0.3: R24.1 R25.1 48.8,10.9 v1(49.3,10.4) ; IC2.F 52.445,18.045 52.6,18.2 52.6,21.3 52.8,21.5 54.5,21.5 58.7,17.3 58.7,7.3 ; v1(54.9,32) 55,32.1 U1.4 ; R22.2 58.4,7 58.7,7.3 ; v1(58.7,5.9) 58.7,7.3
  Bottom Layer w0.2: 40.6,41.9 40.6,40.9 v1(40.8,40.7)
  Bottom Layer w0.3: 47.8,1.6 57.7,1.6 58.7,2.6 v1(58.7,5.9) ; 48.3,7.4 49.3,8.4 v1(49.3,10.4) ; C5.2 54.9,32.1 v1(54.9,32)
  Bottom Layer w0.6: 25.3,41.9 25.35,41.85 C11.2 ; 26.5,41.9 26.7,41.7 D1.1
  Bottom Layer w1: D2.1 7,32.5 1.5,32.5 ; U6.3 23.35,41.65 23.1,41.9 ; D3.1 36.8,7.6 30.8,1.6 ; 48.3,7.4 48.3,2.1 47.8,1.6 30.8,1.6 ; C5.2 54,40.2 52.3,41.9 40.6,41.9 26.5,41.9 25.3,41.9 23.1,41.9 ; 1.5,32.5 1.5,39.6 3.8,41.9 23.1,41.9 ; 1.5,32.5 1.5,2.9 2.8,1.6 30.8,1.6
5V_CAN: D3.2 F2.2 | length 2.1
  Bottom Layer w0.6: F2.2 39.7,6.1 40.3,6.7 D3.2
5V_D: C9.2 D1.2 U4.4 | length 18
  Bottom Layer w0.8: D1.2 27.5,32.8 31.22,32.8 U4.4 40.205,29.295 41.73,27.77 C9.2
BOOT0: R36.2 S1.1 U7.44 | length 22.2
  Top Layer w0.2: U7.44 19.55,26.15 22,28.6 22,29.3 22.598,29.898 23.606,29.898 23.827,30.119 23.827,30.427 24.1,30.7 v1(24.7,30.7) ; v1(28.4,30.3) 29,30.9 29.9,30.9 R36.2 31.2,33.6 32.85,35.25 S1.1
  Bottom Layer w0.2: v1(24.7,30.7) 25.227,30.173 25.716,30.173 25.724,30.18 26.181,30.18 26.188,30.173 28.273,30.173 v1(28.4,30.3)
CAN_N: J6.3 J7.3 R47.1 U8.6 | length 24.8
  Top Layer w0.2: U8.6 32.665,4.435 33.1,4 34.1,4 34.6,4.5 J7.3 35.298,6.298 35.298,6.555 35.445,6.702 41.755,6.702 41.902,6.555 41.902,4.598 42.5,4 43.4,4 43.85,4.45 J6.3 43.7,5.75 43.9,5.95 v1(43.9,6.8)
  Bottom Layer w0.2: v1(43.9,6.8) 43.9,7.7 43.7,7.9 R47.1
CAN_P: J6.2 J7.2 R47.2 U8.7 | length 17.2
  Top Layer w0.2: U8.7@33.935,10.087 U8.7 33.935,7.435 33.35,6.85 33.35,5.857 34.693,7.2 41.5,7.2 ; v1(41.5,7.5) 41.5,7.2 ; J6.2 42.6,6.6 42,7.2 41.5,7.2
  Bottom Layer w0.2: v1(41.5,7.5) 41.7,7.5 R47.2
CAN_RX: U7.45 U8.4 | length 28.4
  Top Layer w0.2: U7.45 21.35,25.65 v1(21.4,25.7) ; v1(29.941,16.041) 29.941,17.041 30.179,17.279 30.421,17.279 30.6,17.1 30.6,16.2 30.8,16 31.2,16 31.4,16.2 31.4,17.1 31.579,17.279 32.021,17.279 32.2,17.1 32.2,15.9 31.395,15.095 U8.4 U8.4@31.4,14.155
  Bottom Layer w0.2: v1(21.4,25.7) 21.449,25.7 22.673,24.476 22.673,22.895 22.82,22.748 23.952,22.748 24.523,22.177 24.523,19.977 25.2,19.3 26.4,19.3 26.652,19.048 26.69,19.048 27.248,18.49 27.248,18.452 29.659,16.041 v1(29.941,16.041)
CAN_TX: U7.46 U8.1 | length 29.3
  Top Layer w0.2: U7.46 20.65,25.15 20.9,24.9 v1(21.4,24.9) ; v1(29.376,15.476) 30,14.851 30,12.4 30.6,11.8 33.905,11.8 35.205,13.1 U8.1
  Bottom Layer w0.2: v1(21.4,24.9) 22.273,24.027 22.273,22.73 22.655,22.348 23.787,22.348 24.123,22.011 24.123,19.811 25.287,18.648 26.524,18.648 26.848,18.324 26.848,18.287 29.376,15.759 v1(29.376,15.476)
CARD_DETECT: J4.A R37.1 U7.13 | length 37.8
  Top Layer w0.2: R37.1 14.3,1.6 16,3.3 16.8,3.3 ; J4.A 18.9,1.2 16.8,3.3 ; U7.13 24.725,23.675 24.964,23.436 25.542,23.436 26.072,22.906 26.072,20.991 25.743,20.662 25.743,17.243 24.382,15.882 22.784,15.882 22.202,15.3 17.1,15.3 16.8,15 16.8,3.3
CARD_PWR: Q1.2 R35.1 U7.14 | length 22.8
  Top Layer w0.2: U7.14 26.15,24.65 26.695,24.105 26.695,18.095 v1(26.295,18.095) ; v1(25.35,10.65) 25.35,11.343 26.802,12.795 26.802,15.152 26.9,15.25 v1(26.9,16.4)
  Bottom Layer w0.2: R35.1 22.4,9.4 23,8.8 24.45,8.8 Q1.2 v1(25.35,10.65) ; v1(26.295,18.095) 26.295,17.005 v1(26.9,16.4)
CO_RES: IC1.H U3.13 | length 20
  Top Layer w0.2: U3.13 40.103,16.372 41.122,16.372 41.125,16.375 44.443,13.057 49.44,13.057 50.544,11.952 51.334,11.952 52.9,10.387 52.9,7.7 53.25,7.35 IC1.H
DEBUG_JTCK: P1.5 R45.1 U7.37 | length 37.2
  Top Layer w0.2: P1.5 10.6,7.8 11.74,8.94 11.74,12.635 12.443,13.338 12.443,21.117 12.097,21.463 12.097,22.796 12.443,23.142 12.443,27.743 14.35,29.65 U7.37
  Bottom Layer w0.2: P1.5 7.2,7.8 8.652,9.252 11.148,9.252 R45.1
DEBUG_JTDI: P1.3 R44.1 U7.38 | length 37.3
  Top Layer w0.2: P1.3 9.1,5.8 12.092,8.792 12.092,12.489 12.5,12.897 12.795,13.192 12.795,21.263 12.449,21.609 12.449,22.65 12.795,22.996 12.795,27.597 14.348,29.15 U7.38
  Bottom Layer w0.2: P1.3 6.252,5.952 10.992,5.952 11.745,5.2 R44.1
DEBUG_JTDO: P1.7 R46.2 U7.39 | length 48.1
  Top Layer w0.2: P1.7 5.6,9.8 4.6,8.8 3.5,8.8 2.9,8.2 2.9,5.4 3.5,4.8 8.603,4.8 12.444,8.641 12.444,12.343 12.548,12.446 13.148,13.046 13.148,21.409 12.802,21.755 12.802,22.504 13.148,22.85 13.148,27.448 14.35,28.65 U7.39
  Bottom Layer w0.2: P1.7 7.3,11 11.1,11 R46.2
DEBUG_JTMS: P1.4 R42.2 U7.34 | length 44.8
  Top Layer w0.2: P1.4 5.027,6.727 5.027,8.127 5.773,8.873 9.973,8.873 11.387,10.287 11.387,12.781 12.09,13.484 12.09,20.971 11.745,21.317 11.745,22.942 12.09,23.288 12.09,27.889 14.229,30.027 17.573,30.027 18.1,29.5 18.7,29.5 18.95,29.75 U7.34
  Bottom Layer w0.2: P1.4 5.1,6.8 8.7,6.8 R42.2@10.4,8.5
DEBUG_NJTRST: P1.2 R43.1 U7.40 | length 42.3
  Top Layer w0.2: P1.2 5.2,2.7 8.802,2.7 10.148,4.046 10.148,5.846 12.797,8.495 12.797,12.197 12.9,12.3 13.5,12.9 13.5,21.555 13.154,21.9 13.154,22.358 13.5,22.704 13.5,27.302 14.348,28.15 U7.40
  Bottom Layer w0.2: P1.2 5.173,4.873 6.484,4.873 6.812,5.2 R43.1
GND: C5.1 C6.1 C7.1 C8.1 C9.1 C10.1 C11.1 C12.1 C13.1 C14.1 C15.1 C16.1 C17.1 C18.1 C19.1 C20.1 C21.1 C22.2 C23.1 C24.1 DS1.2 IC1.B IC1.F IC1.J IC2.D J2.2 J3.5 J3.6 J3.7 J3.8 J3.9 J4.0 J5.6 J6.4 J7.4 J8.4 P1.9 P1.10 Q1.3 R9.1 R10.1 R18.1 R26.1 R35.2 R36.1 R41.1 R45.2 R50.2 R51.2 R52.1 S2.2 U1.11 U2.2 U3.6 U3.7 U3.8 U4.1 U5.3 U6.1 U7.8 U7.23 U7.35 U7.47 U8.2 U8.8 U9.1 U9.5 U9.7 Y1.2 Y1.4 | length 137.5
  Top Layer w0.2: v1(15.55,24.65) U7.47 ; v1(17.6,34.8) 17.6,33.9 18.502,32.998 18.502,32.021 18.45,31.969 U7.35 ; U7.8 21.45,21.95 v1(21.8,21.6) ; U7.23 25.55,29.15 25.952,29.552 v1(25.952,29.627) ; v1(36.5,9.5) 36.5,9.3 36.45,9.25 U8.8 36.055,10.1 C22.2@36.9,10.1
  Top Layer w0.3: DS1.2 v1(3,15.2) ; C24.1 C23.1 ; v1(7.5,20.4) 7.823,20.077 9.225,20.077 U9.1 ; v1(8,16.5) C23.1 8.6,18 9.9,18 ; J3.8 J3.9 2.9,24.5 2.9,27.9 4.025,29.025 J3.7 J3.6 ; U9.7 9.9,16.9 9.9,18 ; U9.5 11.175,17.925 11.1,18 9.9,18 ; v1(27.3,10.3) 27.698,10.698 27.698,12.025 27.875,12.202 28.3,12.202 J4.0@28.3,13.4 ; v1(32.1,12.4) 33.4,12.4 33.935,12.935 U8.2 ; R36.1 35.1,34.5 v1(35.1,35.8) ; C10.1 40,31.9 v1(40.4,31.9) ; v1(42.2,20.6) U2.2 ; U5.3 42.3,31.8 43.3,32.8 v1(43.4,32.8) ; C6.1 43.2,26.6 v1(43.2,25.7) ; v1(44.6,24.4) R9.1 ; v1(44.7,27.8) 44.9,27.6 R18.1 ; U3.6 U3.7 U3.8 v1(45.7,19.6) ; R10.1 47.1,33.3 v1(47.2,33.4) ; U1.11 v1(52.1,32.1) ; IC2.D 54.355,20.045 v1(55,19.4)
  Top Layer w0.4: v2(4.7,27.6) 5.398,26.902 6.257,26.902 6.46,26.7 J3.5 ; J4.0@14.7,12.9 13.8,12 13.8,7.5 v1(13.2,6.9) 12.6,6.9 11.1,5.4 11.1,1.8 12.152,0.748 13.846,0.748 14.198,1.1 J4.0@16.85,1.1 ; J4.0@14.95,13.4 v2(14.95,15.15) ; Y1.4 17.3,20.4 C19.1 15.9,19.2 15.9,17.6 16.5,17 v1(19.1,17) 21.3,17 21.6,17.3 Y1.2 23.1,18.4 C21.1 ; J4.0@24.8,1.2 26.1,1.2 28.5,3.6 v2(28.5,4) ; S2.2@28.775,40.289 v1(30.411,40.289) ; v1(34.1,20.4) R52.1 R51.2 R50.2 ; J7.4 36.5,5.6 v1(36.6,5.5) ; v2(45.1,4.1) J6.4 ; IC1.B v1(51.6,6.1) ; IC1.J v1(55.4,9.35) 56.25,9.35 56.6,9 R26.1 ; IC1.F 55.2,4.47 v1(55.2,3.9)
  Top Layer w0.6: J3.7 4.025,34.425 4.5,34.9 v2(4.5,35.2) J8.4 ; v2(14.5,36.6) 14.8,36.9 J5.6 ; J2.2 46.77,35.67 v2(47.4,36.3)
  Bottom Layer w0.2: v1(17.6,34.8) v1@17.6,34.9 ; 18.6,32.3 18.8,32.3 ; v1(25.952,29.627) v1@26,29.58
  Bottom Layer w0.4: R45.2 v1(13.2,6.9)
NetA1_C: A1.C C2.1 U1.14 | length 17
  Top Layer w0.2: C2.1@50,27 50.15,27.15 U1.14 53.25,30.15 54.7,28.7 58.55,28.7 A1.C
NetA1_R: A1.R R2.1 | length 26.4
  Top Layer w0.2: R2.1 51.6,27.8 52.1,28.3 v1(60.2,28.3)
  Bottom Layer w0.2: v1(60.2,28.3) 71.65,28.3 A1.R
NetA1_S: A1.S R5.1 | length 21.7
  Top Layer w0.2: R5.1 58.8,26.5 v1(58.8,27.681)
  Bottom Layer w0.2: v1(58.8,27.681) 59.971,28.852 65.952,28.852 68.7,31.6 A1.S
NetA2_C: A2.C C4.1 U1.7 | length 48
  Top Layer w0.2: U1.7 57.45,34.05 57.6,34.2 C4.1 58.2,36.1 v1(58.7,35.6) ; v1(59.4,37.1) 61.9,37.1 72.4,26.6 72.4,15.9 70.4,13.9 65.15,13.9 A2.C A2.C@61,10.7
  Bottom Layer w0.2: v1(58.7,35.6) 59.4,36.3 v1(59.4,37.1)
NetA2_R: A2.R R12.1 | length 41.6
  Top Layer w0.2: R12.1 55.4,38.9 61.6,38.9 75.45,25.05 A2.R
NetA2_S: A2.S R14.1 | length 9.1
  Top Layer w0.2: R14.1 63.6,20.2 v1(64.3,19.5)
  Bottom Layer w0.2: v1(64.3,19.5) 66.65,19.5 A2.S
NetC1_1: C1.1 R3.1 R8.2 U1.8 | length 21.2
  Top Layer w0.2: R8.2 R8.2@47.3,30.8 ; R8.2@47.403,30.8 R8.2@47.3,30.8 ; 47.603,30.8 48.248,30.156 48.248,24.352 48.748,23.852 54.052,23.852 54.6,24.4 54.6,25.3 54.7,25.4 R3.1@55.9,25.4 ; U1.8 48.95,34.05 48.2,33.3 48.2,31.7 R8.2@47.3,30.8
NetC1_2: C1.2 R3.2 R5.2 U1.9 | length 21
  Top Layer w0.2: U1.9 49.2,33.4 48.6,32.8 48.6,25.097 49.492,24.205 53.262,24.205 53.852,24.795 53.852,25.884 54.7,26.732 C1.2@54.7,27 ; C1.2@54.6,27.1 C1.2@54.7,27 ; C1.2 C1.2@54.7,27 ; R5.2@57.5,26.9 57.4,27 R3.2 C1.2@54.7,27
NetC2_2: C2.2 R1.1 R2.2 | length 3.1
  Top Layer w0.2: C2.2 51.4,25.2 R2.2 R1.1
NetC3_1: C3.1 R13.1 R17.2 U1.1 | length 43.8
  Top Layer w0.2: R17.2 45.743,29.2 46.495,29.952 47.752,29.952 47.895,29.81 47.895,24.157 48.552,23.5 C3.1 ; U1.1 57.45,30.15 57.9,30.6 57.9,31.8 60.5,34.4 62.7,34.4 63.9,33.2 63.9,31 59.152,26.252 59.152,23.652 C3.1 ; R13.1 59,22 C3.1
NetC3_2: C3.2 R13.2 R14.2 U1.2 | length 17.9
  Top Layer w0.2: v1(54.9,30.4) 55.3,30.8 U1.2 ; R14.2 60.7,21.8 R13.2 60.8,22 C3.2 60.8,27.3 v1(61.3,27.3)
  Bottom Layer w0.2: v1(54.9,30.4) 55.1,30.4 58.7,26.8 60.8,26.8 v1(61.3,27.3)
NetC4_2: C4.2 R11.1 R12.2 | length 3.6
  Top Layer w0.2: R11.1@56.368,36.3 R11.1 R12.2 C4.2
NetC18_2: C18.2 U7.3 X1.2 | length 7
  Top Layer w0.2: v1(18.9,24.1) 18.95,24.05 U7.3
  Bottom Layer w0.2: C18.2@16.6,19.8 C18.2@16.7,19.8 ; C18.2 17.35,19.7 X1.2 18.25,21.05 18.9,21.7 v1(18.9,24.1)
NetC19_2: C19.2 U7.5 Y1.1 | length 7.4
  Top Layer w0.2: C19.2 18.7,18.7 Y1.1 19.6,18.4 20.3,19.1 20.3,21.3 19.95,21.65 U7.5
NetC20_2: C20.2 U7.4 X1.1 | length 7.4
  Top Layer w0.2: U7.4 19.45,23.559 19.8,23.909 v1(19.659,24.05)
  Bottom Layer w0.2: v1(19.659,24.05) 19.659,21.691 X1.1 21.65,19.7 22.5,19.7
NetC21_2: C21.2 U7.6 Y1.3 | length 5.3
  Top Layer w0.2: U7.6 20.45,21.95 21.6,20.8 Y1.3 21.7,20.5 C21.2 ; Y1.3@21.35,20.25 Y1.3@21.7,19.9
NetDS1_1: DS1.1 R40.2 | length 1.9
  Top Layer w0.2: R40.2 3.7,16.2 DS1.1
NetF1_2: F1.2 J2.1 | length 7.2
  Top Layer w0.8: J2.1 40.676,33.724 41.2,33.2 v2(42.3,33.2)
  Bottom Layer w0.8: v2(42.3,33.2) 43.9,34.8 F1.2
NetF2_1: F2.1 J6.1 J7.1 | length 14.4
  Top Layer w0.6: J7.1 32.1,3.3 v2@36.2,3.3 ; v2@36.2,3.7 v2(36.4,3.7) ; 37.013,4.102 39.852,4.102 J6.1
  Bottom Layer w0.6: v2(36.4,3.7) 36.7,3.7 38.1,5.1 F2.1
NetF3_1: F3.1 J3.1 J8.1 | length 12.5
  Top Layer w0.4: J3.1 10.7,29.9 11.1,30.3 ; J8.1 8.25,36.45 v2(9.3,35.4)
  Top Layer w0.6: 11.1,30.3 v2(11.1,31.8)
  Bottom Layer w0.4: v2(9.3,35.4) 11.1,33.6 v2(11.1,31.8)
  Bottom Layer w0.6: F3.1 v2(11.1,31.8)
NetIC1_C: IC1.C R24.2 | length 7.5
  Top Layer w0.2: R24.2 46.6,9.2 46.6,5.8 47.55,4.85 IC1.C
NetIC1_E: IC1.E IC1.G R22.1 | length 7.8
  Top Layer w0.2: IC1.E 53.1,3.52 53.1,5.5 53.7,6.1 IC1.G 56.2,6.1 56.9,5.4 R22.1
NetIC1_K: IC1.K R25.2 | length 3.3
  Top Layer w0.2: R25.2 51.18,9.3 IC1.K
NetIC2_C: IC2.C R26.2 | length 9.1
  Top Layer w0.2: IC2.C 55.855,18.045 56.5,17.4 56.5,13.3 57.4,12.4 R26.2
NetJ3_2: J3.2 J8.2 R27.2 | length 15.2
  Top Layer w0.2: J8.2 7,36 8.498,34.502 10.698,34.502 13.1,32.1 R27.2 13.1,31.3 10.9,29.1 J3.2
NetJ3_3: J3.3 J8.3 R28.2 R29.2 | length 21
  Top Layer w0.2: J8.3 5.75,37.95 6.1,38.3 9.5,38.3 10.6,37.2 R29.2 10.6,35.7 12.8,33.5 13.1,33.5 13.1,33.052 13.5,32.652 13.705,32.652 13.852,32.505 13.852,31.172 11,28.319 11,28.3 J3.3
NetJ4_6: J4.6 Q1.1 | length 4.4
  Top Layer w0.4: v2(23.7,11.9) 24,12.2 J4.6
  Bottom Layer w0.4: Q1.1 23.45,11.65 v2(23.7,11.9)
NetJ5_2: J5.2 R34.1 | length 4.1
  Top Layer w0.2: J5.2 20.945,35.755 23.655,35.755 R34.1
NetJ5_3: J5.3 R33.1 | length 5.6
  Top Layer w0.2: J5.3 19.695,35.605 20.6,34.7 23.345,34.7 R33.1@23.572,34.928
NetR1_2: R1.2 U1.13 | length 9.9
  Top Layer w0.2: U1.13 49.1,30.8 48.952,30.652 48.952,26.716 49.495,26.173 52.273,26.173 R1.2
NetR4_1: R4.1 R6.1 R9.2 | length 3.3
  Top Layer w0.2: R4.1 R6.1
NetR6_2: R6.2 U1.12 | length 12.3
  Top Layer w0.2: v1@44.6,26.3 v1@44.5,26.2 ; v1(44.7,26.2) v1@44.5,26.2 ; R6.2 45.3,26.3 45.2,26.2 v1@44.5,26.2 ; U1.12 50.2,31.4 v1(51.5,31.4)
  Bottom Layer w0.2: v1(44.7,26.2) 45,26.5 47.5,26.5 51.5,30.5 v1(51.5,31.4)
NetR7_2: R7.2 U1.10 | length 6.9
  Top Layer w0.2: U1.10 51.45,32.75 52,33.3 52,36.9 52.8,37.7 R7.2@52.8,37.8
NetR8_1: R8.1 R10.2 U7.11 | length 30.1
  Top Layer w0.2: U7.11 22.95,21.85 22.952,21.848 24.143,21.848 24.826,22.531 v1(25.167,22.531) ; v1(31.2,24.1) 31.495,23.805 34.914,23.805 35.271,23.448 35.729,23.448 36.086,23.805 36.474,23.805 40.722,28.052 43.652,28.052 44.7,29.1 44.7,30.3 45.2,30.8 R8.1 R10.2
  Bottom Layer w0.2: v1(25.167,22.531) 25.531,22.531 26,23 29.6,23 30.7,24.1 v1(31.2,24.1)
NetR11_2: R11.2 U1.6 | length 4.6
  Top Layer w0.2: R11.2 54.4,33.6 54.6,33.4 U1.6
NetR15_2: R15.2 U1.5 | length 9.3
  Top Layer w0.2: R15.2 53.6,38.6 53.6,33.3 54.15,32.75 U1.5
NetR16_2: R16.2 U1.3 | length 7.9
  Top Layer w0.2: R16.2 52.8,32.1 53.452,31.448 56.248,31.448 U1.3
NetR17_1: R17.1 R18.2 U7.12 | length 30.2
  Top Layer w0.2: U7.12 24.672,22.875 24.88,23.083 25.396,23.083 25.719,22.76 25.719,22.302 25.35,21.933 v1(25.35,21.7) ; v1(30.8,23.3) 30.952,23.452 34.768,23.452 35.125,23.095 35.875,23.095 36.232,23.452 36.62,23.452 40.868,27.7 43.798,27.7 44.498,28.4 46.8,28.4 ; R18.2 47.1,28.1 46.8,28.4 ; R17.1 47.1,28.7 46.8,28.4
  Bottom Layer w0.2: v1(25.35,21.7) 25.6,21.7 26.4,22.5 30.2,22.5 30.8,23.1 v1(30.8,23.3)
NetR19_1: R19.1 R20.2 U7.21 | length 30.2
  Top Layer w0.2: U7.21 27.05,28.15 28.457,26.743 28.457,18.044 28.87,17.632 32.568,17.632 34.305,15.895 35.306,15.895 40.302,10.9 R19.1 42,9.4 R20.2
NetR20_1: R20.1 R21.2 U7.22 | length 31.9
  Top Layer w0.2: U7.22 27.048,28.65 28.81,26.889 28.81,18.19 29.016,17.984 32.714,17.984 34.451,16.248 35.452,16.248 38.399,13.301 39.601,12.099 40.801,12.099 R20.1 43.5,9.4 R21.2
NetR21_1: R21.1 R23.2 U7.25 | length 36.5
  Top Layer w0.2: U7.25 24.025,31.5 25.1,31.5 25.69,30.91 25.69,30.506 26.017,30.18 26.181,30.18 29.162,27.199 29.162,18.336 32.86,18.336 34.597,16.6 35.598,16.6 39.747,12.452 40.947,12.452 41.598,11.8 42.6,11.8 R21.1 45,9.4 R23.2
NetR33_2: R33.2 U7.30 | length 7.4
  Top Layer w0.2: U7.30 20.95,32.552 21.798,33.4 23.045,33.4 23.049,33.395 24.895,33.395 25.4,33.9 R33.2 R33.2@25.4,34.7
NetR34_2: R34.2 U7.31 | length 8.8
  Top Layer w0.2: U7.31 20.45,32.55 21.652,33.752 23.191,33.752 23.195,33.748 24.405,33.748 24.6,33.943 24.6,35.405 24.8,35.605 25.105,35.605 R34.2
NetR39_2: R39.2 R40.1 | length 2.5
  Top Layer w0.2: R40.1 3.7,19.6 R39.2
NetR48_1: R48.1 U7.42 U9.4 | length 13.1
  Top Layer w0.2: U9.4 11.175,21.375 11.192,21.358 v1(11.192,21.278) ; v1(14.1,22.8) 14.1,22.88 14.7,23.48 14.7,24.22 14.645,24.275 14.645,26.245 15.55,27.15 U7.42
  Bottom Layer w0.2: R48.1 11.077,20.377 11.077,21.677 12.2,22.8 v1(14.1,22.8) ; v1(11.192,21.278) 11.278,21.278 11.5,21.5
NetR49_1: R49.1 U7.43 U9.3 | length 16.5
  Top Layer w0.2: U9.3 v1(10.525,21.675) ; v1(13.707,22.129) 14.529,22.129 14.898,22.498 14.898,23.179 15.1,23.381 15.1,24.319 14.998,24.421 14.998,26.099 15.548,26.65 U7.43
  Bottom Layer w0.2: v1(10.525,21.675) 10,21.15 10,19.743 10.295,19.448 11.848,19.448 12.5,20.1 12.5,21.2 13.429,22.129 v1(13.707,22.129)
NH3_RES: IC1.D U3.15 | length 22.3
  Top Layer w0.2: U3.15 41.927,15.075 44.297,12.705 49.294,12.705 50.398,11.6 51.188,11.6 52.5,10.288 52.5,4.12 IC1.D
NO2_RES: IC1.A U3.14 | length 22.4
  Top Layer w0.2: U3.14 39.225,15.725 38.8,15.3 38.8,13.897 39.893,12.804 41.093,12.804 41.544,12.352 49.148,12.352 50.3,11.2 51.09,11.2 52.148,10.142 52.148,7.648 51.85,7.35 IC1.A
NRST: P1.8 R38.2 S2.1 U7.7 | length 62
  Top Layer w0.2: P1.8 4.002,9.8 2.5,8.298 2.5,3.4 3.552,2.348 8.948,2.348 10.5,3.9 10.5,5.7 13.149,8.349 13.149,12.051 13.852,12.754 13.852,18.8 16.1,21.048 16.1,22.3 18.598,24.798 19.902,24.798 20.95,23.75 ; U7.7 20.95,23.75 ; v1(22.8,26.4) 22.648,26.248 22.648,25.448 21.952,24.752 21.952,24.671 21.629,24.348 21.548,24.348 20.95,23.75 ; R38.2 27.5,33.1 28.775,34.375 S2.1@28.775,35.489 ; R38.2@27.7,31.8 28.1,31.4 v1(28.2,31.4)
  Bottom Layer w0.2: v1(22.8,26.4) 22.648,26.552 22.648,30.248 23.652,31.252 28.052,31.252 v1(28.2,31.4)
O3_RES: IC2.G U3.12 | length 14.3
  Top Layer w0.2: U3.12 40.973,17.025 44.589,13.41 47.61,13.41 48.2,14 48.2,16.2 48.715,16.715 50.1,16.715 IC2.G
RES_MES: R23.1 U2.3 U3.3 | length 17.1
  Top Layer w0.2: U2.3 46.125,21.675 47.4,20.4 47.4,15.3 ; R23.1 45.1,11 v1(45.1,11.8) ; U3.3 46.975,15.725 47.4,15.3 ; v1(47.4,14.3) 47.4,15.3
  Bottom Layer w0.2: v1(45.1,11.8) 45.1,11.9 47.4,14.2 v1(47.4,14.3)
RESIST_VOLT: U2.1 U2.4 U7.10 | length 25.7
  Top Layer w0.2: U7.10 22.45,21.75 22.873,21.327 24.373,21.327 24.8,20.9 v1(25.2,20.9) ; v1(31.2,22.5) 31.8,23.1 34.622,23.1 34.979,22.743 36.021,22.743 36.378,23.1 39.825,23.1 U2.1 41.25,22.45 43.15,24.35 U2.4
  Bottom Layer w0.2: v1(25.2,20.9) 25.6,20.9 26.7,22 30.7,22 v1(31.2,22.5)
RTCK: P1.6 R41.2 | length 7.2
  Bottom Layer w0.2: P1.6 5.1,8.8 7.2,8.8 8.6,10.2 R41.2
SD_CS: J4.2 R30.1 U7.18 | length 36.9
  Top Layer w0.2: J4.2 19.6,12.4 v1(19.7,12.3) 19.7,11 22,8.7 27,8.7 28,7.7 28.9,7.7 29.2,8 29.2,14.9 29.177,14.923 29.147,14.923 28.105,15.965 28.105,24.69 26.145,26.65 U7.18
  Bottom Layer w0.2: v1(19.7,12.3) 20.3,12.9 R30.1
SD_MISO: J4.7 R32.1 U7.16 | length 18
  Top Layer w0.2: U7.16 26.148,25.65 27.4,24.398 27.4,17.8 25.1,15.5 J4.7 25.1,12.8 v1(24.8,12.5)
  Bottom Layer w0.2: R32.1 24.7,12.5 v1(24.8,12.5)
SD_MOSI: J4.3 R31.1 U7.17 | length 28.3
  Top Layer w0.2: J4.3 20.7,12.6 v1(21,12.3) 21,11.8 22.702,10.098 25.579,10.098 27.2,11.719 27.2,15.052 27.752,15.604 27.752,24.544 26.147,26.15 U7.17
  Bottom Layer w0.2: v1(21,12.3) 21.9,13.2 R31.1
SD_SCLK: J4.5 U7.15 | length 15.3
  Top Layer w0.2: J4.5 22.9,14.63 23.8,15.53 24.631,15.53 27.048,17.946 27.048,24.252 26.15,25.15 U7.15
SEN_SEL1: R50.1 U3.11 U7.28 | length 37.7
  Top Layer w0.2: U7.28 21.95,32.45 22.5,33 26.1,33 26.748,32.352 26.748,31.108 30.219,27.637 30.219,22.078 30.392,21.905 37.394,21.905 38.152,21.146 38.152,20.746 38.846,20.052 41.146,20.052 41.852,19.346 41.852,18.452 41.075,17.675 U3.11 38.575,17.675 38.3,17.4 R50.1
SEN_SEL2: R51.1 U3.10 U7.27 | length 35.8
  Top Layer w0.2: U7.27 22.45,32.298 22.8,32.648 25.954,32.648 26.395,32.206 26.395,30.963 29.867,27.491 29.867,21.932 30.246,21.552 37.248,21.552 37.8,21 37.8,20.6 38.7,19.7 41,19.7 41.5,19.2 41.5,18.6 41.225,18.325 U3.10 38.775,18.325 38.2,18.9 R51.1
SEN_SEL3: R52.2 U3.9 U7.26 | length 28.1
  Top Layer w0.2: U7.26 22.95,32.145 23.1,32.295 25.805,32.295 26.043,32.057 26.043,30.659 26.169,30.532 26.327,30.532 29.514,27.345 29.514,21.786 30.1,21.2 36.4,21.2 37,20.6 R52.2 37.4,20.4 38.825,18.975 U3.9
STATUS_LED: R39.1 U7.41 | length 20
  Top Layer w0.2: R39.1 3.5,21.2 8.932,21.2 11.3,23.568 v1(11.3,26.7) ; v1(14.55,27.15) 14.55,27.65 U7.41
  Bottom Layer w0.2: v1(11.3,26.7) 14.1,26.7 v1(14.55,27.15)
USB_DM: R27.1 U7.32 | length 13.9
  Top Layer w0.2: R27.1 14.7,32.948 14.095,32.948 13.948,33.095 13.948,34.452 15.2,35.705 18.895,35.705 19.95,34.65 U7.32
USB_DP: R28.1 U7.33 | length 9.5
  Top Layer w0.2: R28.1 16.352,35.352 18.748,35.352 19.45,34.65 U7.33
V_IN: C8.2 F1.1 U4.3 | length 8.9
  Bottom Layer w0.8: U4.3 41.455,39.145 C8.2@42.212,38.388 ; C8.2 44.425,36.4 F1.1
V_USB: D2.2 F3.2 | length 2.6
  Bottom Layer w0.6: D2.2 9.9,28 10.4,28.5 F3.2
pads on no net: IC2.A IC2.B IC2.E IC2.H IC2.J IC2.K J2.TAB1 J2.TAB2 J3.4 J3.X J3.Y J4.1 J4.8 J5.0 J5.1 J5.4 J5.5 J6.0 J7.0 J8.0 U3.1 U3.2 U3.4 U3.5 U7.2 U7.19 U7.20 U7.29 U8.5

## Polygon pours and split planes (outlines as drawn)
GND on Bottom Layer "GND_L02_P000" (solid, remove dead copper, pour order 0): 0.4,42.4 0.4,0.4 79.3,0.4 79.3,42.4

## Silkscreen, mask and mechanical layers (free items; w line width, h text height)
Top Overlay:
  lines w0.15: 1,15.6 1,16.6 ; 1.1,15.6 1.1,16.6
  text "Rev. A" at 58.3,0.7 h1
Mechanical 1:
  the board outline again, w0.15